# EAGLE board Arduino-UNO-Sheild (EAGLE 7.3.0)
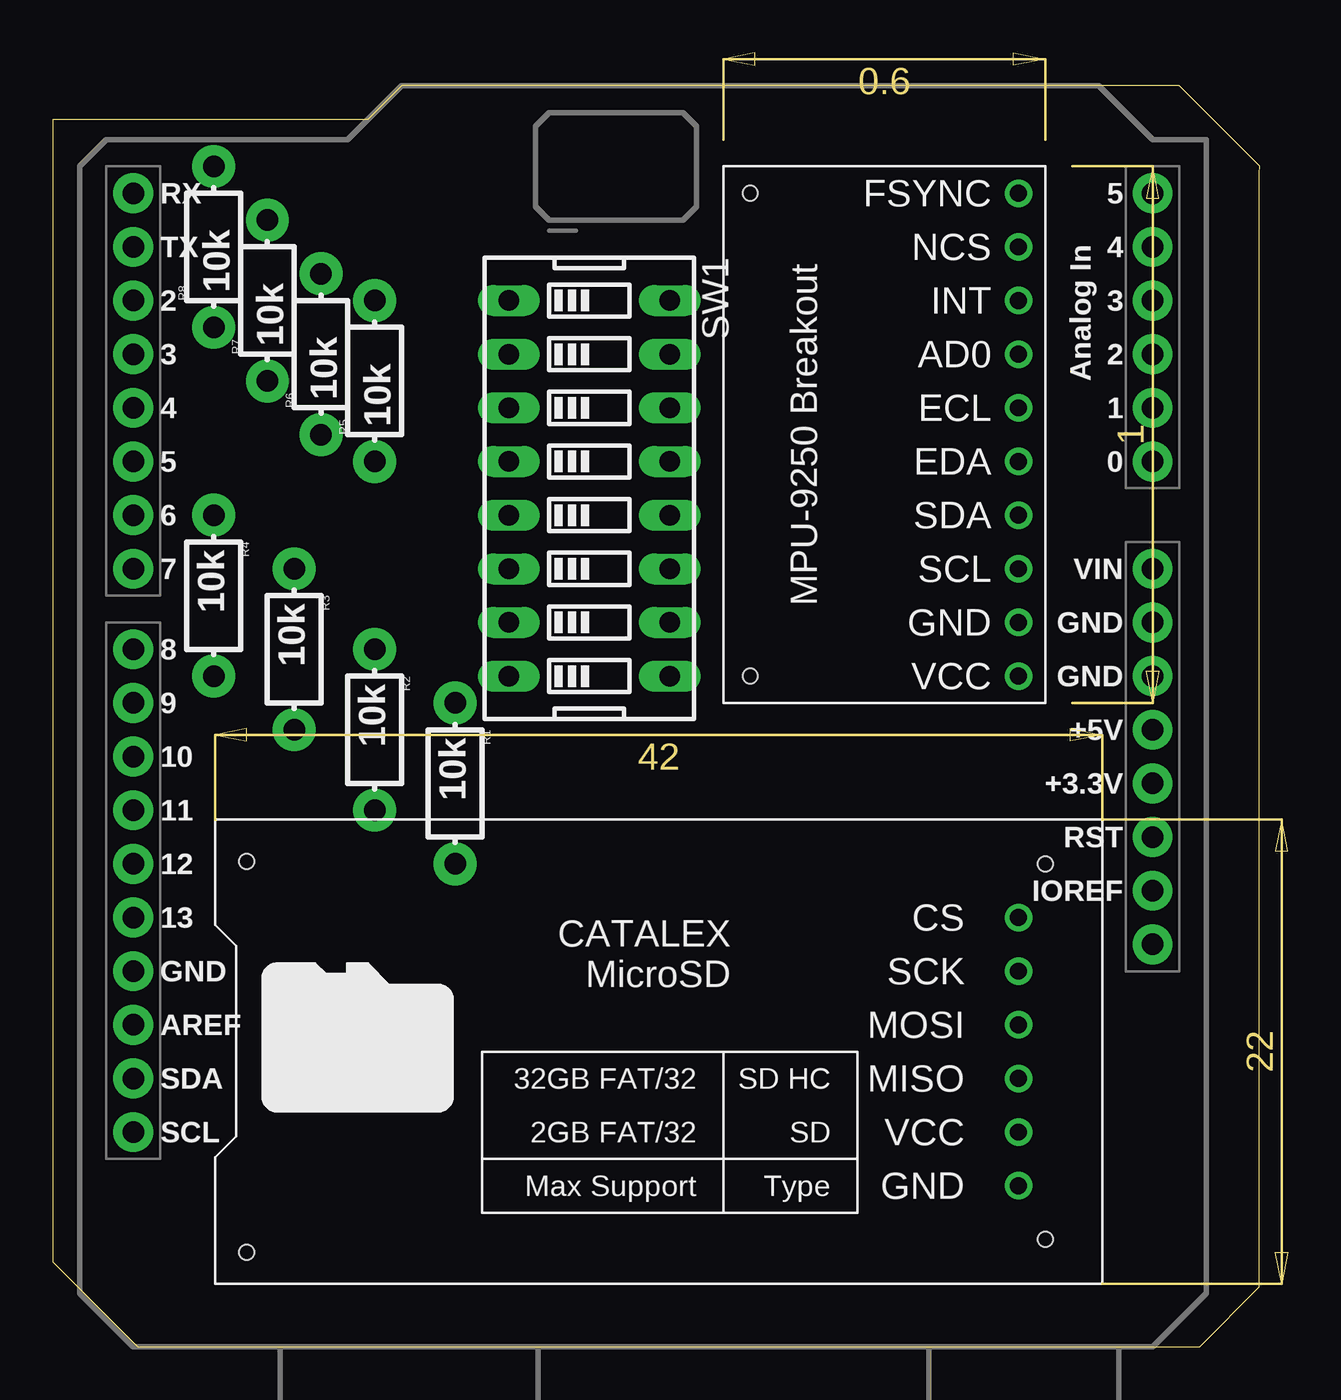
[diagram p0: board, top side]
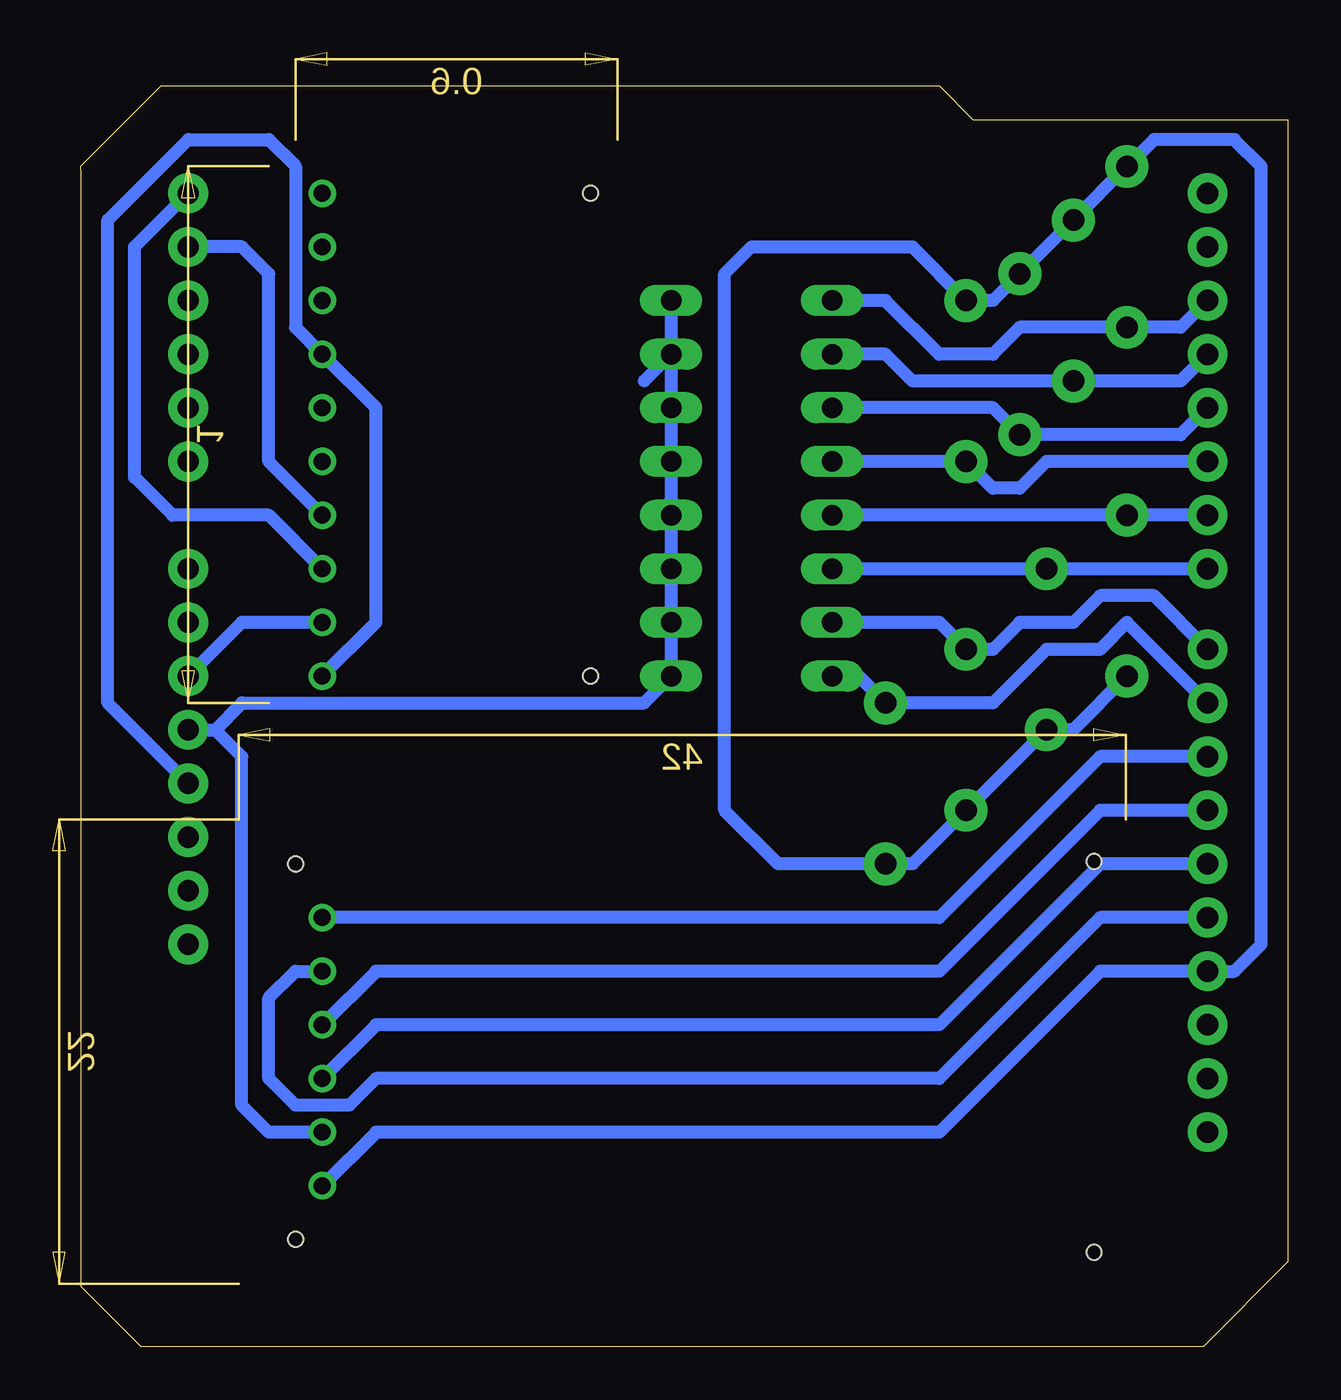
[diagram p1: board, bottom side, seen from below]

Size 57.15 x 59.69 mm. Coordinates in mm from the lower left corner, seen from the top.
Outline: 0,58.09 0,4.02 4.02,0 54.3,0 57.13,2.83 57.13,55.55 57.15,55.88 53.34,59.69 16.51,59.69 14.91,58.09 0,58.09
Copper layers (1*16): Top 0.035mm / dielectric 1.5mm / Bottom 0.035mm
Design rules "default": minimum track width 10mil, minimum drill 24mil, track to track 8mil, track to pad 8mil, pad to pad 8mil, via to via 8mil, smd to smd 8mil, copper to edge 40mil, drill to drill 8mil, minimum pad ring 10mil, minimum via ring 8mil, stop-mask expansion 4mil, vias tented up to drill 0mil, thermal gap 10mil

## Footprints (pad centres in the part's own frame; a part is rotated, then mirrored left to right if it is on the bottom)
UNO_R3_SHIELD = drill 1.016 pad 1.88: 3.3V 50.8,26.67; 5V 50.8,29.21; A0 50.8,41.91; A1 50.8,44.45; A2 50.8,46.99; A3 50.8,49.53; A4 50.8,52.07; A5 50.8,54.61; AREF 2.54,15.24; D2 2.54,49.53; D3 2.54,46.99; D4 2.54,44.45; D5 2.54,41.91; D6 2.54,39.37; D7 2.54,36.83; D8 2.54,33.02; D9 2.54,30.48; D10 2.54,27.94; D11 2.54,25.4; D12 2.54,22.86; D13 2.54,20.32; GND@0 50.8,31.75; GND@1 50.8,34.29; GND@2 2.54,17.78; IOREF 50.8,21.59; NC 50.8,19.05; RES 50.8,24.13; RX 2.54,54.61; SCL 2.54,10.16; SDA 2.54,12.7; TX 2.54,52.07; VIN 50.8,36.83
AXIAL-0.3-KIT = drill 1.016 pad 2.032: P$1 -3.81,0; P$2 3.81,0
DIPSWITCH-08 = drill 0.97 long: 1 -8.89,-3.81; 2 -6.35,-3.81; 3 -3.81,-3.81; 4 -1.27,-3.81; 5 1.27,-3.81; 6 3.81,-3.81; 7 6.35,-3.81; 8 8.89,-3.81; 9 8.89,3.81; 10 6.35,3.81; 11 3.81,3.81; 12 1.27,3.81; 13 -1.27,3.81; 14 -3.81,3.81; 15 -6.35,3.81; 16 -8.89,3.81
CATALEX-MICROSD-BREAKOUT = drill 0.8: CS -2.54,-6.35; GND -2.54,6.35; MISO -2.54,1.27; MOSI -2.54,-1.27; SCK -2.54,-3.81; VCC -2.54,3.81 | hole 0.7: -3.81,8.89; -3.81,-8.89; 34,-9; 34,9.5
MPU-9250-BREAKOUT = drill 0.8: AD0 -2.54,-3.81; ECL -2.54,-1.27; EDA -2.54,1.27; FSYNC -2.54,-11.43; GND -2.54,8.89; INT -2.54,-6.35; NCS -2.54,-8.89; SCL -2.54,6.35; SDA -2.54,3.81; VCC -2.54,11.43 | hole 0.7: 10.16,11.43; 10.16,-11.43

## Placement (x,y rotation side)
J1  ARDUINO_R3_SHIELD  [UNO_R3_SHIELD]  1.27,0 0 top
R1  10k  [AXIAL-0.3-KIT]  19.05,26.67 270 top
R2  10k  [AXIAL-0.3-KIT]  15.24,29.21 270 top
R3  10k  [AXIAL-0.3-KIT]  11.43,33.02 270 top
R4  10k  [AXIAL-0.3-KIT]  7.62,35.56 270 top
R5  10k  [AXIAL-0.3-KIT]  15.24,45.72 90 top
R6  10k  [AXIAL-0.3-KIT]  12.7,46.99 90 top
R7  10k  [AXIAL-0.3-KIT]  10.16,49.53 90 top
R8  10k  [AXIAL-0.3-KIT]  7.62,52.07 90 top
SW1  [DIPSWITCH-08]  25.4,40.64 270 top
U$1  CATALEX-MICROSD-BREAKOUT  [CATALEX-MICROSD-BREAKOUT]  43.18,13.97 180 top
U$2  MPU-9250-BREAKOUT  [MPU-9250-BREAKOUT]  43.18,43.18 180 top

## Library data of the parts
J1 = SparkFun-Boards
R1-R8 = SparkFun-Passives
SW1 = SparkFun-Electromechanical
U$1 U$2 = Modules

## Nets
N$1: J1.A4 U$2.SDA
N$2: J1.A5 U$2.SCL
N$3: J1.3.3V U$2.AD0 U$2.VCC
N$4: J1.GND@0 U$2.GND
N$6: J1.D10 U$1.CS
N$7: J1.D13 U$1.SCK
N$8: J1.D11 U$1.MOSI
N$9: J1.D12 U$1.MISO
N$10: J1.D9 R1.P$1 SW1.8
N$11: J1.D8 R2.P$1 SW1.7
N$12: J1.D7 R3.P$1 SW1.6
N$13: J1.D6 R4.P$1 SW1.5
N$14: J1.D5 R5.P$1 SW1.4
N$15: J1.D4 R6.P$1 SW1.3
N$16: J1.D3 R7.P$1 SW1.2
N$17: J1.D2 R8.P$1 SW1.1
N$18: J1.5V SW1.9 SW1.10 SW1.11 SW1.12 SW1.13 SW1.14 SW1.15 SW1.16 U$1.VCC
N$20: J1.GND@2 R1.P$2 R2.P$2 R3.P$2 R4.P$2 R5.P$2 R6.P$2 R7.P$2 R8.P$2 U$1.GND

## Tracks (layer width: path | path; a pad name or v marks a point on that pad's centre or on a via)
N$1
  Bottom 0.61: U$2.SDA 48.26,41.91 48.26,50.8 49.53,52.07 J1.A4
N$2
  Bottom 0.61: U$2.SCL 48.26,39.37 52.81,39.37 54.61,41.17 54.61,52.07 J1.A5
N$3
  Bottom 0.61: U$2.VCC 43.18,34.29 43.18,44.45 U$2.AD0 46.99,48.26 46.99,55.88 48.26,57.15 52.07,57.15 55.88,53.34 55.88,30.48 J1.3.3V
N$4
  Bottom 0.61: U$2.GND 49.53,34.29 J1.GND@0
N$6
  Bottom 0.61: J1.D10 8.89,27.94 16.51,20.32 U$1.CS
N$7
  Bottom 0.61: J1.D13 8.89,20.32 16.51,12.7 43.18,12.7 44.45,11.43 46.99,11.43 48.26,12.7 48.26,16.51 46.99,17.78 U$1.SCK
N$8
  Bottom 0.61: J1.D11 8.89,25.4 16.51,17.78 43.18,17.78 U$1.MOSI
N$9
  Bottom 0.61: J1.D12 8.89,22.86 16.51,15.24 43.18,15.24 U$1.MISO
N$10
  Bottom 0.61: SW1.8 20.32,31.75 R1.P$1 13.97,30.48 11.43,33.02 8.89,33.02 7.62,34.29 J1.D9
N$11
  Bottom 0.61: J1.D8 6.35,35.56 8.89,35.56 10.16,34.29 12.7,34.29 13.97,33.02 R2.P$1 16.51,34.29 SW1.7
N$12
  Bottom 0.61: J1.D7 R3.P$1 SW1.6
N$13
  Bottom 0.61: J1.D6 R4.P$1 SW1.5
N$14
  Bottom 0.61: J1.D5 11.43,41.91 12.7,40.64 13.97,40.64 R5.P$1 SW1.4
N$15
  Bottom 0.61: J1.D4 5.08,43.18 R6.P$1 13.97,44.45 SW1.3
N$16
  Bottom 0.61: J1.D3 5.08,45.72 R7.P$1 17.78,45.72 19.05,46.99 SW1.2
N$17
  Bottom 0.61: J1.D2 5.08,48.26 R8.P$1 12.7,48.26 13.97,46.99 16.51,46.99 19.05,49.53 SW1.1
N$18
  Bottom 0.61: SW1.16 SW1.15 | 30.48,45.72 SW1.15 | SW1.15 SW1.14 SW1.13 SW1.12 SW1.11 SW1.10 SW1.9 30.48,30.48 49.53,30.48 50.8,29.21 | U$1.VCC 48.26,10.16 49.53,11.43 49.53,27.94 50.8,29.21 | J1.5V 50.8,29.21
N$20
  Bottom 0.61: R4.P$2 10.16,29.21 R3.P$2 R2.P$2 17.78,22.86 R1.P$2 24.13,22.86 26.67,25.4 26.67,50.8 25.4,52.07 17.78,52.07 R5.P$2 13.97,49.53 R6.P$2 R7.P$2 R8.P$2 6.35,57.15 2.54,57.15 1.27,55.88 1.27,19.05 2.54,17.78 J1.GND@2 8.89,17.78 16.51,10.16 43.18,10.16 U$1.GND